# Altium PCB Portable Power Bank.PcbDoc
Units mm, origin at the board's own origin, x right, y up, seen from the top; angles counter-clockwise.
Board outline 51 x 35 mm, 2 copper layers (Top Layer, Bottom Layer); 57 components, 43 nets, 200 pads, 73 vias.
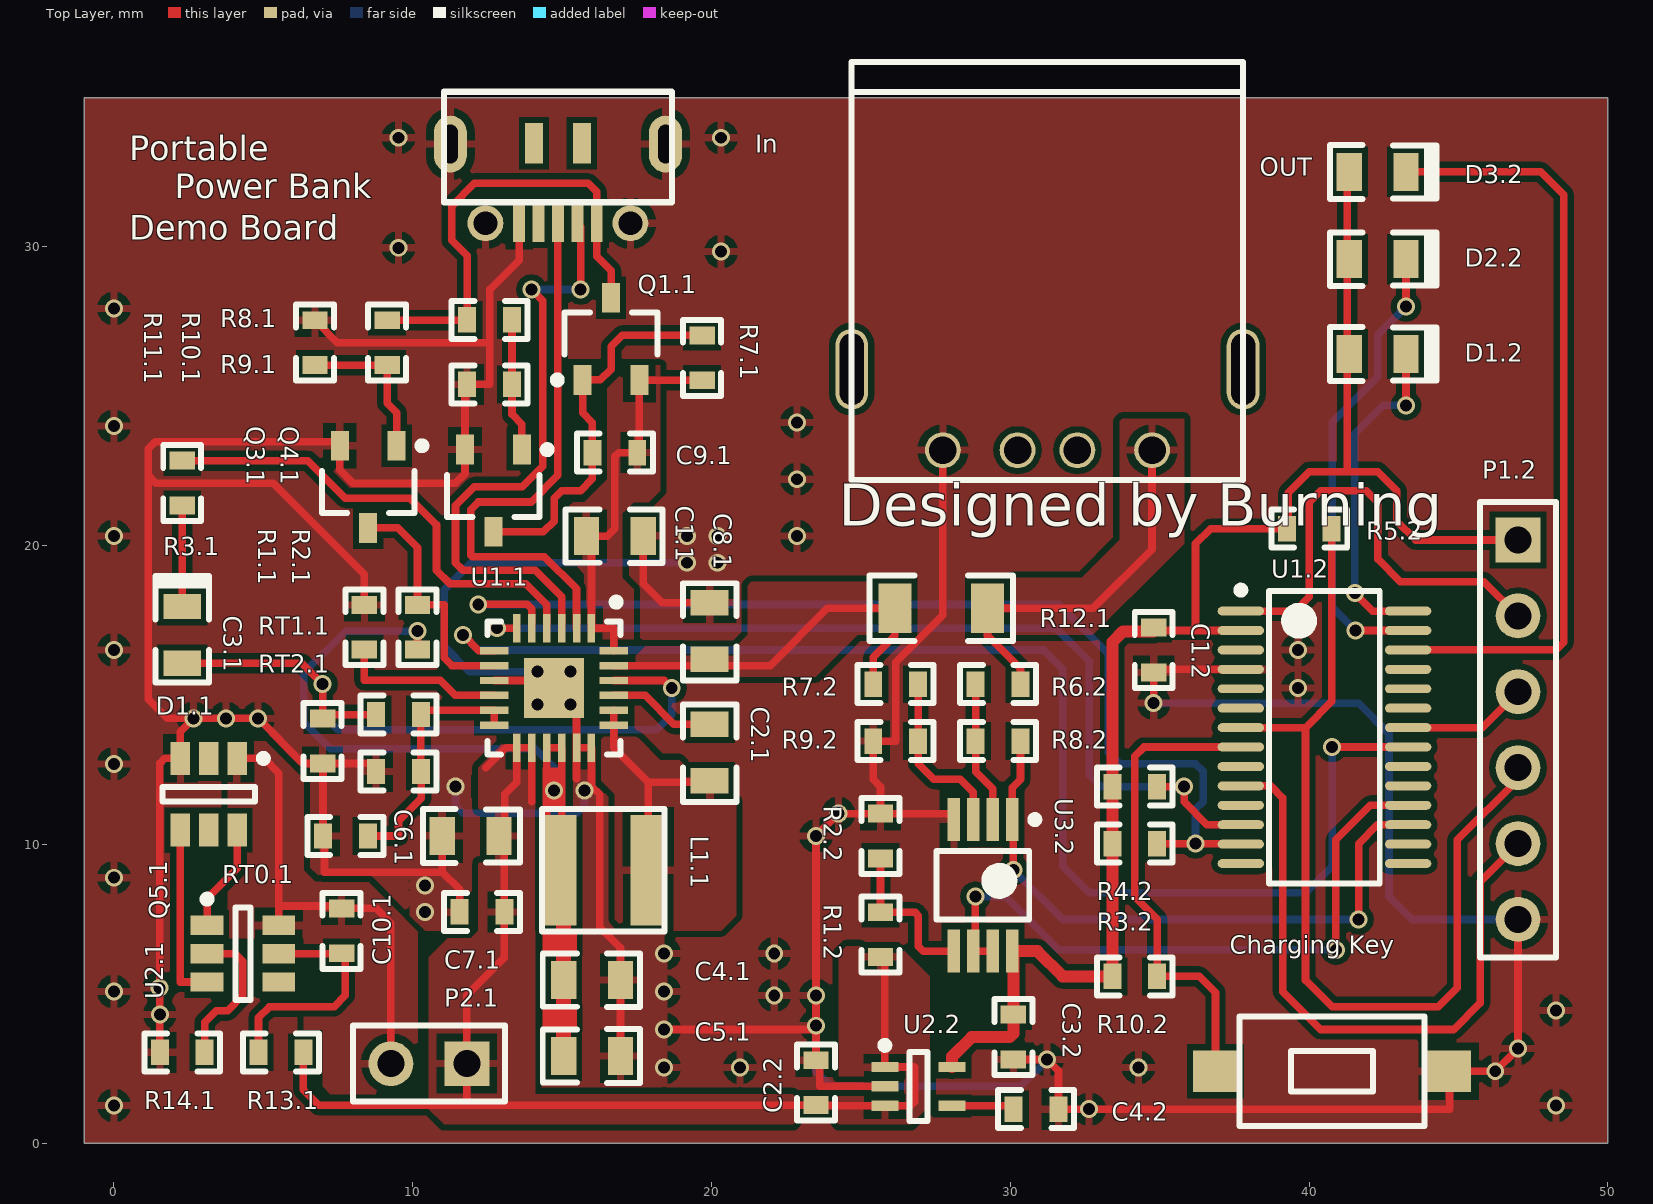
[diagram p0: Top Layer view]
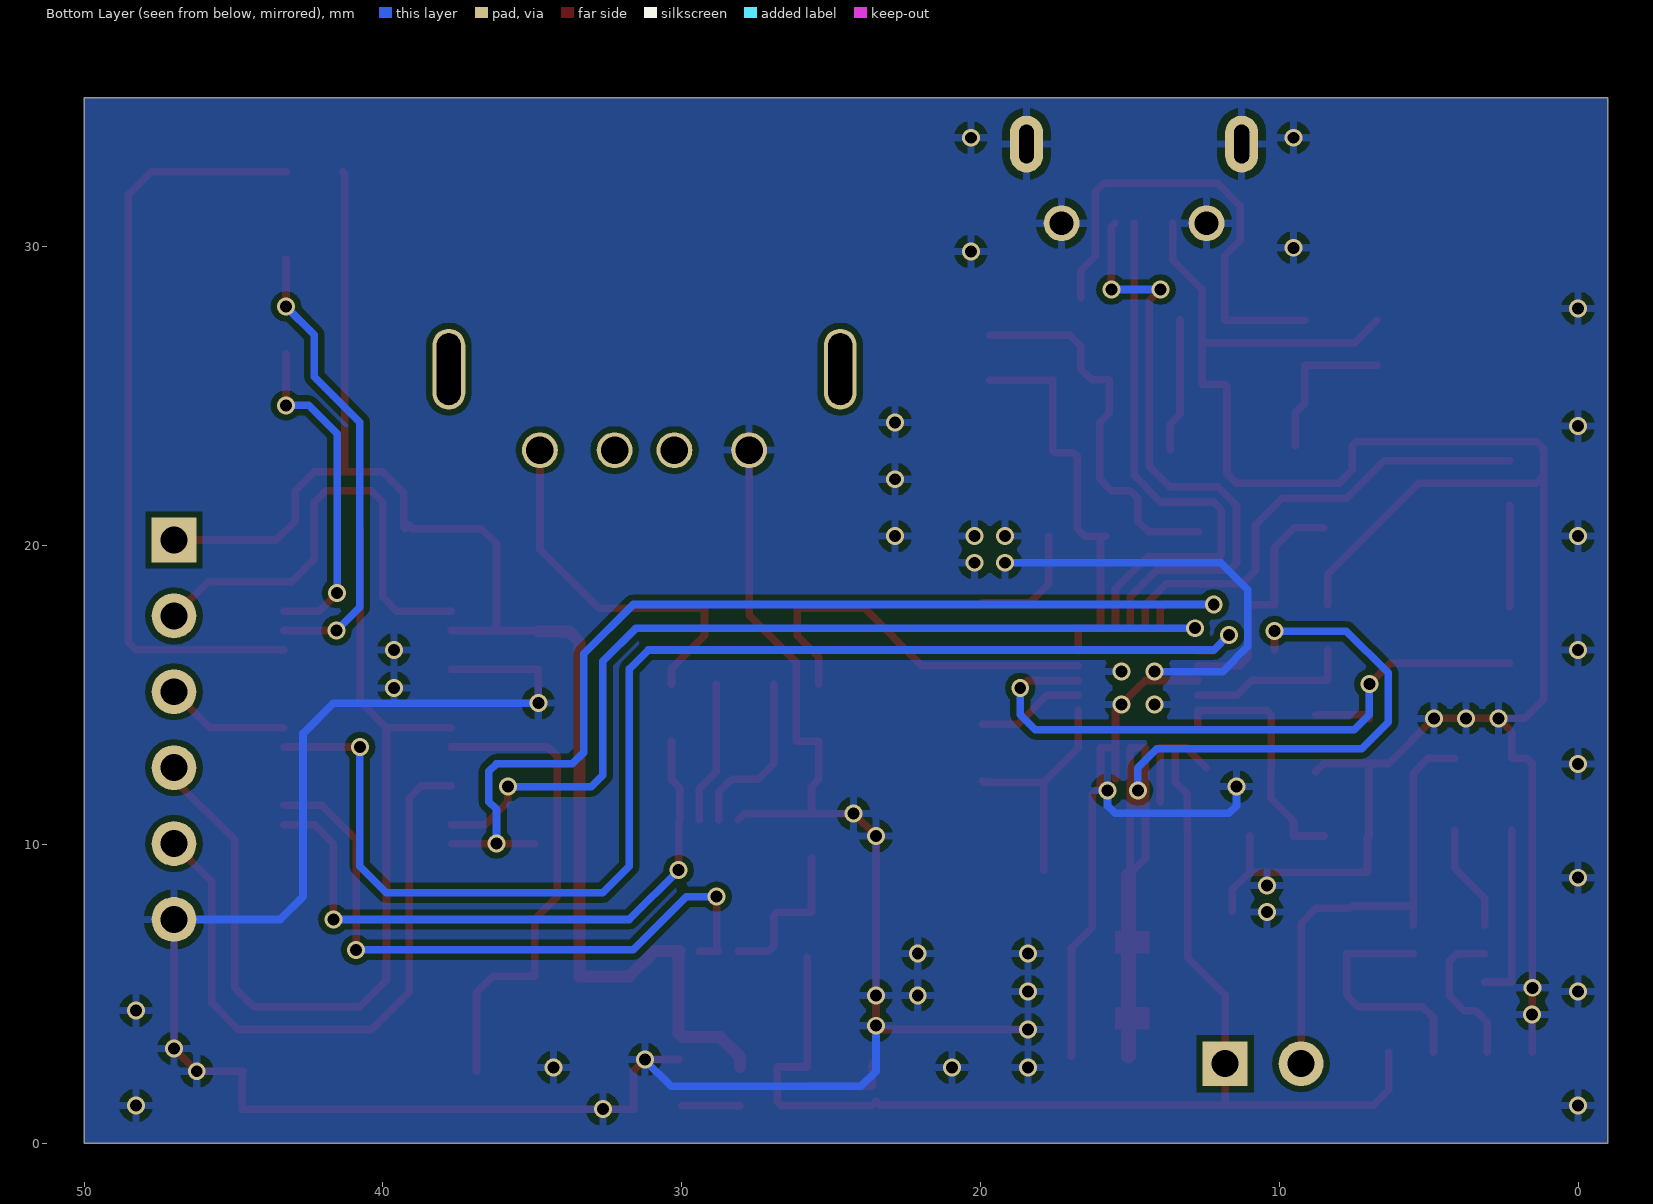
[diagram p1: Bottom Layer view, seen from below]

## Layer stack, top to bottom
Top Solder: solder mask 0.0102, Solder Resist, Dk 3.5
Top Layer: signal copper 0.0356
Dielectric 1: dielectric 0.32, FR-4, Dk 4.8
Bottom Layer: signal copper 0.0356
Bottom Solder: solder mask 0.0102, Solder Resist, Dk 3.5

## Board outline
-1,0 -1,35 50,35 50,0

## Design rules (kind name [scope] priority, off if disabled: settings)
Clearance [All] p1: gap=0.2
PolygonConnect [All] p1: connectstyle=Relief reliefconductorwidth=0.254 reliefentries=4 polygonreliefangle="90 Angle" airgapwidth=0.254
RoutingVias [All] p1: holewidth=0.711 width=1.27 viastyle="Through Hole" minholewidth=0.711 minwidth=1.27 maxholewidth=0.711 maxwidth=1.27
SolderMaskExpansion [All] p1: expansion=0.102
Width [All] p1: maxlimit=1 minlimit=0.254 preferedwidth=0.254
30 further rules are at their usual default settings.

## Classes and differential pairs
component class "Portable Power Source": C1.1 C2.1 C3.1 C4.1 C5.1 C6.1 C7.1 C8.1 C9.1 C10.1 D1.1 In L1.1 P2.1 Q1.1 Q3.1 Q4.1 Q5.1 R1.1 R2.1 R3.1 R7.1 R8.1 R9.1 R10.1 R11.1 R12.1 R13.1 R14.1 RT0.1 RT1.1 RT2.1 U1.1 U2.1

## Components (designator, comment, footprint, x,y, rotation, side; value= is the part's Value field where it differs from the comment)
C1.1 "0603" D0805 16.764,20.32 r180 top (schematic designator C1)
C1.2 "0603" D0603 34.798,16.51 r90 top (schematic designator C1)
C2.1 "0603" D0805 19.939,13.081 r270 top (schematic designator C2)
C2.2 "0603" D0603 23.495,2.032 r270 top (schematic designator C2)
C3.1 "0603" D0603 6.985,13.462 r90 top (schematic designator C3)
C3.2 "0603" D0603 30.099,3.556 r90 top (schematic designator C3)
C4.1 "0805" D0805 16.002,5.461 r180 top (schematic designator C4)
C4.2 "0603" D0603 30.861,1.143 r180 top (schematic designator C4)
C5.1 "0805" D0805 16.002,2.921 r180 top (schematic designator C5)
C6.1 "0805" D0805 11.938,10.287 r0 top (schematic designator C6)
C7.1 "0603" D0603 12.319,7.747 r0 top (schematic designator C7)
C8.1 "0805" D0805 19.939,17.145 r270 top (schematic designator C8)
C9.1 "0603" D0603 16.764,23.114 r180 top (schematic designator C9)
C10.1 "0603" D0603 7.62,7.112 r270 top (schematic designator C10)
"Charging Key" "Charging Key" SW_A 40.767,2.413 r0 top (schematic designator S1)
D1.1 "0603/0805" D0805_Diode 2.286,17.018 r90 top (schematic designator D1)
D1.2 "0603/0805" D0805_Diode 42.291,26.416 r0 top (schematic designator D1)
D2.2 "0603/0805" D0805_Diode 42.291,29.591 r0 top (schematic designator D2)
D3.2 "0603/0805" D0805_Diode 42.291,32.512 r0 top (schematic designator D3)
In "Power" Micro.Horn 14.859,32.131 r0 top (schematic designator P1)
L1.1 "Inductor" INDUCTOR.4040 16.383,9.144 r180 top (schematic designator L1)
OUT "USB Female" "USB Female" 31.242,25.908 r180 top (schematic designator P0)
P1.2 "BSL Program Interface" HDR1X6 46.99,20.193 r270 top (schematic designator P1)
P2.1 "Battery" HDR1X2 11.811,2.667 r180 top (schematic designator P2)
Q1.1 "AO3401" SOT23 16.637,26.924 r90 top (schematic designator Q1)
Q3.1 "Si2312" SOT23 8.509,21.971 r270 top (schematic designator Q3)
Q4.1 "Si2312" SOT23 12.7,21.844 r270 top (schematic designator Q4)
Q5.1 "FS8205" SOT23-6_N 3.175,11.684 r270 top (schematic designator Q5)
R1.1 "0603" D0603 8.382,17.272 r270 top (schematic designator R1)
R1.2 "0603" D0603 25.654,6.985 r270 top (schematic designator R1)
R2.1 "0603" D0603 10.16,17.272 r270 top (schematic designator R2)
R2.2 "0603" D0603 25.654,10.287 r270 top (schematic designator R2)
R3.1 "0603" D0603 2.286,22.098 r270 top (schematic designator R3)
R3.2 "0603" D0603 34.163,10.033 r180 top (schematic designator R3)
R4.2 "0603" D0603 34.163,11.938 r180 top (schematic designator R4)
R5.2 "0603" D0603 40.005,20.574 r0 top (schematic designator R5)
R6.2 "0603" D0603 29.591,15.367 r0 top (schematic designator R6)
R7.1 "0603" D0603 19.685,26.289 r90 top (schematic designator R7)
R7.2 "0603" D0603 26.162,15.367 r0 top (schematic designator R7)
R8.1 "0603" D0603 12.573,27.559 r180 top (schematic designator R8)
R8.2 "0603" D0603 29.591,13.462 r0 top (schematic designator R8)
R9.1 "0603" D0603 12.573,25.4 r0 top (schematic designator R9)
R9.2 "0603" D0603 26.162,13.462 r0 top (schematic designator R9)
R10.1 "0603" D0603 9.144,26.797 r90 top (schematic designator R10)
R10.2 "0603" D0603 34.163,5.588 r0 top (schematic designator R10)
R11.1 "0603" D0603 6.731,26.797 r270 top (schematic designator R11)
R12.1 "2512" D1206 27.686,17.907 r180 top (schematic designator R12)
R13.1 "0603" D0603 5.588,3.048 r180 top (schematic designator R13)
R14.1 "0603" D0603 2.286,3.048 r0 top (schematic designator R14)
RT0.1 "0603" D0603 7.747,10.287 r0 top (schematic designator RT0)
RT1.1 "0603" D0603 9.525,14.351 r180 top (schematic designator RT1)
RT2.1 "0603" D0603 9.525,12.446 r0 top (schematic designator RT2)
U1.1 "bq24195" QFN24 14.732,15.24 r270 top (schematic designator U1)
U1.2 "MSP430F21x2" TSSOP28 40.513,13.589 r0 top (schematic designator U1)
U2.1 "DW01" SOT23-6_N 4.318,6.35 r0 top (schematic designator U2)
U2.2 "RT9193" SC70-5 26.924,1.905 r0 top (schematic designator U2)
U3.2 "TLV342" TSSOP8 29.083,8.636 r270 top (schematic designator U3)

## Footprints (in the part's own frame and the unit in brackets; to place one, negate y for a bottom-side part, rotate by r counter-clockwise, add the part's x,y. Pads: shape width x height; smd on the part's side, far side on the other; paste and mask are expansions set on the pad)
D0603 [mm] "D0603"
  rect 0.6x0.85 smd: 1(-0.75,0) 2(0.75,0)
  silkscreen extent -1.27,-0.64 1.27,0.64, body extent -0.8,-0.4 0.8,0.4, height 0.5
D0805 [mm] "D0805"
  rect 0.85x1.27 smd: 1(-0.95,0) 2(0.95,0)
  silkscreen extent -1.6,-0.9 1.65,0.9, body extent -1,-0.64 1,0.64, height 1.25
D0805_Diode [mm] "D0805 Diode"
  rect 0.85x1.27 smd: 1(-0.95,0) 2(0.95,0)
  silkscreen extent -1.6,-0.99 1.97,0.99, body extent -1,-0.64 1,0.64, height 1.25
D1206 [mm] "D1206"
  rect 1.1x1.65 smd: 1(-1.55,0) 2(1.55,0)
  silkscreen extent -2.4,-1.1 2.4,1.1, body extent -1.6,-0.8 1.6,0.8, height 1.1
HDR1X2 [mm] "Connector; Header; 2 Position"
  rect 1.5x1.5 hole 0.9: 1(0,0)
  round 1.5 hole 0.9: 2(2.54,0)
  silkscreen extent -1.27,-1.27 3.81,1.27
HDR1X6 [mm] "Connector; Header; 6 Position"
  rect 1.5x1.5 hole 0.9: 1(0,0)
  round 1.5 hole 0.9: 2(2.54,0) 3(5.08,0) 4(7.62,0) 5(10.16,0) 6(12.7,0)
  silkscreen extent -1.27,-1.27 13.97,1.27
INDUCTOR.4040 [mm]
  rect 1.2x3.7 smd mask+0.05: 1(-1.5,0) 2(1.5,0)
  silkscreen extent -2.05,-2.05 2.05,2.05
Micro.Horn [mm]
  oval 1.1x1.9 hole 0.5 slot 1.3 at 90 deg: 0(-3.6,1.313) 0(3.6,1.313)
  round 1.2 hole 0.8: 0(-2.425,-1.337) 0(2.425,-1.337)
  rect 0.6x1.35 smd: 0(-0.8,1.338) 0(0.8,1.338)
  rect 0.4x1.25 smd: 1(1.3,-1.337) 2(0.65,-1.337) 3(0,-1.337) 4(-0.65,-1.337) 5(-1.3,-1.337)
  silkscreen extent -3.81,-0.64 3.81,3.06
QFN24 [mm] "QFN, 24-Leads, Body 4.00x4.00mm, Pitch 0.50mm, Thermal Pad 2.70x2.70mm, IPC Low Density"
  rect 0.95x0.25 smd: 1(-2,1.25) 2(-2,0.75) 3(-2,0.25) 4(-2,-0.25) 5(-2,-0.75) 6(-2,-1.25) 13(2,-1.25) 14(2,-0.75) 15(2,-0.25) 16(2,0.25) 17(2,0.75) 18(2,1.25)
  rect 0.25x0.95 smd: 7(-1.25,-2) 8(-0.75,-2) 9(-0.25,-2) 10(0.25,-2) 11(0.75,-2) 12(1.25,-2) 19(1.25,2) 20(0.75,2) 21(0.25,2) 22(-0.25,2) 23(-0.75,2) 24(-1.25,2)
  rect 2x2 smd: 25(0,0)
  silkscreen extent -3,-2.22 2.22,2.23, body extent -2.08,-2.07 2.07,2.08, height 1
SC70-5 [mm] "SC70, 5-Leads, Body 2.03x2.13mm, Pitch 0.65mm, IPC Medium Density"
  rect 0.9x0.35 smd: 1(-1.125,0.65) 2(-1.125,0) 3(-1.125,-0.65) 4(1.125,-0.65) 5(1.125,0.65)
  silkscreen extent -1.25,-1.15 0.3,1.5, body extent -0.67,-1.12 0.67,1.13, height 1.1
SOT23 [mm] "SOT23, 3-Leads, Body 2.90x2.80mm, Pitch 0.95mm, IPC Medium Density"
  rect 1x0.6 smd: 1(-1.375,0.95) 2(1.375,0) 3(-1.375,-0.95)
  silkscreen extent -1.5,-1.55 0.87,1.92, body extent -0.88,-1.52 0.87,1.53, height 1.45
SOT23-6_N [mm] "SOT23, 6-Leads, Body 2.9x1.6mm, Pitch 0.95mm, Lead Span 2.7mm, IPC Medium Density"
  rect 1.1x0.65 smd: 1(-1.2,0.95) 2(-1.2,0) 3(-1.2,-0.95) 4(1.2,-0.95) 5(1.2,0) 6(1.2,0.95)
  silkscreen extent -1.32,-1.55 0.25,1.95, body extent -0.9,-1.55 0.9,1.55, height 1.45
SW_A [mm] "SMA Switch"
  rect 1.5x1.4 smd mask+0.05: 1(-3.9,0) 2(3.9,0)
  silkscreen extent -3.1,-1.83 3.1,1.83, body extent -3.1,-1.83 3.1,1.83, height 2
TSSOP8 [mm] "TSOP, 8-Leads, Body 3.00x3.00mm, Pitch 0.65mm, IPC Medium Density"
  rect 1.45x0.42 smd: 1(-2.2,0.975) 2(-2.2,0.325) 3(-2.2,-0.325) 4(-2.2,-0.975) 5(2.2,-0.975) 6(2.2,-0.325) 7(2.2,0.325) 8(2.2,0.975)
  silkscreen extent -2.32,-1.55 1.15,1.86, body extent -1.55,-1.55 1.55,1.55, height 1.1
TSSOP28 [mm] "TSOP, 28-Leads, Body 9.70x4.40mm, Pitch 0.65mm, IPC High Density"
  oval 1.55x0.3 smd: 1(-2.8,4.225) 2(-2.8,3.575) 3(-2.8,2.925) 4(-2.8,2.275) 5(-2.8,1.625) 6(-2.8,0.975) 7(-2.8,0.325) 8(-2.8,-0.325) 9(-2.8,-0.975) 10(-2.8,-1.625) 11(-2.8,-2.275) 12(-2.8,-2.925) 13(-2.8,-3.575) 14(-2.8,-4.225) 15(2.8,-4.225) 16(2.8,-3.575) 17(2.8,-2.925) 18(2.8,-2.275) 19(2.8,-1.625) 20(2.8,-0.975) 21(2.8,-0.325) 22(2.8,0.325) 23(2.8,0.975) 24(2.8,1.625) 25(2.8,2.275) 26(2.8,2.925) 27(2.8,3.575) 28(2.8,4.225)
  silkscreen extent -2.92,-4.9 1.85,5.05, body extent -2.25,-4.9 2.25,4.9, height 1.2
"USB Female" [mm]
  round 1.2 hole 0.92 mask+0.05: 1(-3.5,2.71) 2(-1,2.71) 3(1,2.71) 4(3.5,2.71)
  oval 1.1x2.7 hole 0.8 slot 2.4 at 90 deg mask+0.05: 5(-6.55,0) 5(6.55,0)
  silkscreen extent -6.55,-10.28 6.55,3.71

## Part data
C1.1 C1.2 C2.1 C2.2 C3.1 C3.2 C4.1 C4.2 C5.1 C6.1 C7.1 C8.1 C9.1 C10.1: library part Cap, "Capacitor"
"Charging Key": library part SW-PB, "Switch"
D1.1 D1.2 D2.2 D3.2: library part LED0, "Typical INFRARED GaAs LED"
In: library part "Micro USB Horn", "MIcro USB Connector Horn"
P1.2: library part "Header 6", "Header, 6-Pin"
P2.1: library part "Header 2", "Header, 2-Pin"
Q1.1: "AO3401 P-Channel MOSFET"
Q3.1 Q4.1: "SI2312 N-Channel MOSFEt"
Q5.1: "FS8205 Dual MOS"
R1.1 R1.2 R2.1 R2.2 R3.1 R3.2 R4.2 R5.2 R6.2 R7.1 R7.2 R8.1 R8.2 R9.1 R9.2 R10.1 R10.2 R11.1 R12.1 R13.1 R14.1 RT0.1 RT1.1 RT2.1: library part Res1, "Resistor"
U1.1: "A Battery charger manager published by Ti"
U1.2: library part MSP430F21x2_PW, "MSP430F21x2_PW"
U2.1: "Battery Protector"
U2.2: "3V3 Voltage Regulator"
U3.2: library part LPV358, "LPV358 Op Amp"

## Via types
v1: diameter 0.6, hole 0.4, Top Layer to Bottom Layer, 73 vias

## Nets (pads, with @x,y where several pads share a name; then routed paths per layer and width w, separated by ;. In a path a pad name is that pad's centre, name@x,y a point inside that pad or via, vN(x,y) a via of type N, cw(c..) or ccw(c..) an arc to the next point about the centre after c; other vN are vias at no path point)
3V3: C1.2.2 C3.2.2 D1.2.1 D2.2.1 D3.2.1 P1.2.1 R3.2.2 R4.2.2 R5.2.1 R10.2.1 U1.2.2 U2.2.5 U3.2.8 | length 51.7
  Top Layer w0.254: U3.2.8 U3.2.8@30.099,6.395 ; C1.2.2@34.798,17.133 34.829,17.164 36.195,17.164 ; U1.2.2 36.195,17.164 ; R5.2.1@39.128,20.701 39.001,20.574 36.703,20.574 36.195,20.066 36.195,17.164 ; R5.2.1 39.306,20.626 39.306,21.78 40.005,22.479 41.275,22.479 ; D3.2.1 41.275,32.446 41.275,22.479 ; P1.2.1 43.561,20.193 42.926,20.828 42.926,21.844 42.291,22.479 41.275,22.479
  Top Layer w0.4: U2.2.5 28.049,2.903 28.702,3.556 29.972,3.556 30.099,3.683 C3.2.2 U3.2.8@30.099,6.395 ; U3.2.8 30.902,6.436 31.75,5.588 R10.2.1 R4.2.2 33.413,16.776 33.77,17.133 C1.2.2@34.798,17.133
ADC_B: U1.2.18 U3.2.6 U3.2.7 | length 21.9
  Top Layer w0.254: v1(28.829,8.255) 28.829,6.507 U3.2.6 U3.2.7 ; v1(40.894,6.477) 40.894,10.16 42.048,11.314 U1.2.18
  Bottom Layer w0.254: v1(28.829,8.255) 29.845,8.255 31.623,6.477 v1(40.894,6.477)
ADC_L: R8.2.2 U1.2.17 U3.2.1 | length 21.2
  Top Layer w0.254: v1(30.099,9.144) 30.099,10.795 U3.2.1 30.058,11.897 30.341,12.18 R8.2.2 ; v1(41.656,7.493) 41.656,10.033 42.287,10.664 U1.2.17
  Bottom Layer w0.254: v1(30.099,9.144) 31.75,7.493 v1(41.656,7.493)
BAT: C2.2.2 C6.1.2 C7.1.2 P2.1.1 R1.2.2 R13.1.1 U1.1.13 U1.1.14 U2.2.1 U2.2.3 | length 44.2
  Top Layer w0.254: R13.1.1 6.338,1.79 6.858,1.27 11.811,1.27 ; 12.446,12.573 13.113,13.24 U1.1.13 ; 13.982,11.442 U1.1.14 U1.1.13 ; R1.2.2@25.799,6.235 U2.2.1 26.782,2.555 26.797,2.54 26.797,1.397 26.655,1.255 U2.2.3 23.649,1.255 23.495,1.409 23.356,1.27 11.811,1.27 ; 11.811,1.27 P2.1.1 11.811,4.953 13.069,6.211 C7.1.2 13.069,10.468 13.081,10.48 13.081,11.684 13.482,12.085 U1.1.13
D+: In.3 U1.1.2 | length 18.7
  Top Layer w0.254: In.3 14.859,22.359 13.963,21.463 12.192,21.463 11.938,21.209 11.938,19.685 11.991,19.632 14.404,19.632 15.482,18.554 U1.1.2
D-: In.2 U1.1.3 | length 20.4
  Top Layer w0.254: v1(13.97,28.575) 14.351,28.194 14.351,22.658 13.664,21.971 12.058,21.971 11.43,21.343 11.43,19.431 11.683,19.178 14.096,19.178 14.982,18.292 U1.1.3 ; In.2 15.621,30.681 v1(15.621,28.575)
  Bottom Layer w0.254: v1(13.97,28.575) v1(15.621,28.575)
GND: "Charging Key.2" C1.1.1 C1.2.1 C2.2.1 C3.1.1 C3.2.1 C4.1.1 C4.2.1 C5.1.1 C6.1.1 C7.1.1 C8.1.1 In.0@11.259,33.444 In.0@12.434,30.794 In.0@17.284,30.794 In.0@18.459,33.444 In.5 OUT.4 P1.2.6 Q3.1.3 Q4.1.3 Q5.1.3 R1.1.1 R2.2.1 R9.1.1 R9.2.1 R11.1.1 R14.1.1 RT0.1.1 RT2.1.1 U1.1.9 U1.1.17 U1.1.18 U1.1.25 U1.2.4 U2.2.2 U3.2.4 | length 207.5
  Top Layer w0.254: R14.1.1 1.536,12.712 1.708,12.884 Q5.1.3 2.225,13.782 v1(2.667,14.224) ; R11.1.1 7.481,26.797 12.573,26.797 ; R1.1.1 8.382,19.05 5.334,22.098 1.397,22.098 1.143,22.352 ; RT2.1.1 8.509,12.712 C3.1.1 ; C6.1.1 10.988,9.078 ; C7.1.1 11.569,8.497 10.988,9.078 ; U1.1.9 14.482,15.49 U1.1.25 v1(15.282,14.69) ; In.5 13.559,29.561 12.573,28.575 12.573,26.797 ; 15.482,12.204 U1.1.17 ; U1.1.25@15.482,14.49 U1.1.17 ; C5.1.1 C4.1.1 16.952,6.543 16.256,7.239 16.256,11.684 15.982,11.958 U1.1.18 U1.1.17 ; C1.1.1 17.714,18.735 18.354,18.095 C8.1.1 ; v1(18.415,3.81) 23.368,3.81 v1(23.495,3.937) ; U2.2.2 25.799,1.909 23.618,1.909 23.618,2.659 C2.2.1 v1(23.495,3.937) ; OUT.4 27.742,17.676 26.162,16.096 26.162,13.462 R9.2.1 25.412,12.18 25.654,11.938 R2.2.1 ; U3.2.4 27.907,11.037 R2.2.1 ; C3.2.1 v1(31.23,2.806) 31.611,2.425 C4.2.1 v1(32.639,1.143) 44.704,1.143 44.704,2.376 44.667,2.413 v1(46.228,2.413) v1(46.99,3.175) P1.2.6 ; v1(34.798,14.732) C1.2.1 ; C1.2.1@34.798,15.864 U1.2.4 ; 1.143,22.352 1.143,23.241 1.377,23.475 7.43,23.475 Q3.1.3 7.559,22.54 8.001,22.098 11.43,22.098 11.75,22.418 Q4.1.3 11.75,25.327 R9.1.1 12.573,25.4 12.573,26.797 ; 1.143,22.352 1.143,14.859 1.778,14.224 v1(2.667,14.224) ; v1(2.667,14.224) v1(3.746,14.224) v1(4.826,14.224) 6.338,12.712 C3.1.1 ; C3.1.1 6.997,12.7 RT0.1.1 7.046,10.238 7.046,9.078 10.988,9.078 ; v1(23.495,3.937) v1(23.495,4.953) v1(23.495,10.287) v1(24.245,11.037) R2.2.1
  Bottom Layer w0.254: v1(11.43,11.938) 11.43,11.303 11.684,11.049 15.494,11.049 15.748,11.303 v1(15.748,11.811) ; v1(14.182,15.79) 11.896,15.79 11.049,16.637 11.049,18.526 11.954,19.431 v1(19.177,19.431) ; v1(23.495,3.937) 23.495,2.413 24.003,1.905 30.353,1.905 31.23,2.782 v1(31.23,2.806) ; v1(34.798,14.732) 41.656,14.732 42.672,13.716 42.672,8.255 43.434,7.493 P1.2.6
  other v1: 0,1.27 48.26,1.27 18.415,2.54 20.955,2.54 34.29,2.54 1.536,4.318 48.26,4.445 22.098,4.953 0,5.08 18.415,5.08 1.524,5.207 18.415,6.35 22.098,6.35 10.414,7.747 10.414,8.636 0,8.89 0,12.7 14.182,14.69 39.624,15.24 15.282,15.79 0,16.51 39.624,16.51 20.193,19.431 0,20.32 19.177,20.32 20.193,20.32 22.86,20.32 22.86,22.225 0,24.003 22.86,24.13 0,27.94 20.32,29.845 9.525,29.972 9.525,33.655 20.32,33.655
INT: U1.1.7 U1.2.21 | length 44.8
  Top Layer w0.254: v1(11.684,17.018) 12.212,16.49 U1.1.7 ; v1@40.711,13.264 v1(40.767,13.264) U1.2.21
  Bottom Layer w0.254: v1(11.684,17.018) 12.192,16.51 31.115,16.51 31.75,15.875 31.75,9.271 32.639,8.382 39.878,8.382 40.767,9.271 v1(40.767,13.264)
KEY: "Charging Key.1" R10.2.2 U1.2.8 | length 16.2
  Top Layer w0.254: 36.867,2.413 36.867,5.043 36.322,5.588 R10.2.2 34.913,7.505 34.163,8.255 34.163,12.954 34.473,13.264 U1.2.8
LED1: D1.2.2 U1.2.28 | length 11.2
  Top Layer w0.254: v1(41.529,18.415) 42.13,17.814 U1.2.28 ; v1(43.241,24.699) D1.2.2
  Bottom Layer w0.254: v1(41.529,18.415) 41.529,23.749 42.479,24.699 v1(43.241,24.699)
LED2: D2.2.2 U1.2.27 | length 15.5
  Top Layer w0.254: v1(41.548,17.164) U1.2.27 ; v1(43.241,28.006) D2.2.2
  Bottom Layer w0.254: v1(41.548,17.164) 40.767,17.945 40.767,24.13 42.291,25.654 42.291,27.056 v1(43.241,28.006)
LED3: D3.2.2 U1.2.26 | length 25.9
  Top Layer w0.254: D3.2.2 47.752,32.512 48.514,31.75 48.514,16.764 48.264,16.514 U1.2.26
NetC1.1_2: C1.1.2 C9.1.1 Q1.1.3 R7.1.1 U1.1.1 U1.1.24 | length 13.3
  Top Layer w0.254: C1.1.2 16.51,20.32 16.764,20.574 16.764,22.987 16.891,23.114 C9.1.1 17.587,23.187 Q1.1.3 17.597,25.539 R7.1.1 ; C1.1.2@15.982,20.152 U1.1.1 16.732,17.24 U1.1.24
NetC2.1_1: C2.1.1 U1.1.21 | length 3.6
  Top Layer w0.254: U1.1.21 17.776,14.99 18.735,14.031 C2.1.1
NetC2.1_2: C2.1.2 L1.1.1 U1.1.19 U1.1.20 | length 7.9
  Top Layer w0.254: U1.1.20 U1.1.19 16.732,13.24 17.883,12.089 ; L1.1.1 17.883,12.089 ; C2.1.2 19.897,12.089 17.883,12.089
NetC4.2_2: C4.2.2 U2.2.4 | length 1.9
  Top Layer w0.254: U2.2.4 C4.2.2@29.999,1.255
NetC8.1_2: C8.1.2 R7.2.1 R12.1.2 U1.1.23 | length 13
  Top Layer w0.254: U1.1.23 21.959,15.99 23.876,17.907 R12.1.2 26.136,16.992 25.412,16.268 R7.2.1
NetC9.1_2: C9.1.2 Q1.1.1 Q4.1.2 R7.1.2 | length 13
  Top Layer w0.254: Q4.1.2 14.373,20.469 14.732,20.828 14.732,21.59 14.986,21.844 15.621,21.844 16.014,22.237 C9.1.2 16.014,24.118 15.687,24.445 Q1.1.1 16.278,25.549 16.637,25.908 16.637,26.67 17.006,27.039 R7.1.2
NetC10.1_1: C10.1.1 P2.1.2 Q5.1.1 U2.1.6 | length 15.4
  Top Layer w0.254: Q5.1.1 5.023,12.884 5.518,12.389 5.518,7.944 ; U2.1.6 5.518,7.944 ; P2.1.2 9.271,7.366 8.775,7.862 C10.1.1 7.538,7.944 5.518,7.944
NetC10.1_2: C10.1.2 R13.1.2 U2.1.5 | length 8
  Top Layer w0.254: R13.1.2 4.838,4.203 5.207,4.572 7.366,4.572 7.747,4.953 7.747,6.362 7.735,6.35 U2.1.5
NetD1.1_2: D1.1.2 R3.1.2 | length 3.4
  Top Layer w0.254: D1.1.2 R3.1.2
NetP0.3_1: OUT.1 R6.2.2 R12.1.1 | length 12.6
  Top Layer w0.254: R6.2.2 30.341,15.887 29.236,16.992 R12.1.1 32.766,17.907 34.742,19.883 OUT.1
NetP1.1_1: In.1 Q1.1.2 R8.1.2 R10.1.2 | length 15.7
  Top Layer w0.254: R10.1.2 11.811,27.547 R8.1.2 11.823,29.706 11.303,30.226 11.303,31.369 12.065,32.131 15.875,32.131 16.159,31.847 In.1 16.159,29.688 16.637,29.21 Q1.1.2
NetQ3.1_1: Q3.1.1 R10.1.1 R11.1.2 | length 5.2
  Top Layer w0.254: R11.1.2 R10.1.1 9.144,24.765 9.459,24.45 Q3.1.1
NetQ3.1_2: Q3.1.2 R2.1.1 U1.1.8 | length 8.3
  Top Layer w0.254: Q3.1.2 9.503,20.596 10.16,19.939 R2.1.1 11.049,18.022 11.049,16.256 11.315,15.99 U1.1.8
NetQ4.1_1: Q4.1.1 R8.1.1 R9.1.2 | length 4.5
  Top Layer w0.254: R8.1.1 R9.1.2 13.323,24.396 13.65,24.069 Q4.1.1
NetQ5.1_4: Q5.1.4 U2.1.3 | length 6
  Top Layer w0.254: Q5.1.4 2.22,10.479 2.22,5.4 U2.1.3
NetQ5.1_6: Q5.1.6 U2.1.1 | length 3.6
  Top Layer w0.254: U2.1.1 3.118,8.198 4.125,9.205 Q5.1.6
NetR1.1_2: R1.1.2 U1.1.10 | length 5.6
  Top Layer w0.254: R1.1.2 8.382,15.494 10.922,15.494 11.426,14.99 U1.1.10
NetR1.2_1: R1.2.1 R2.2.2 U3.2.5 | length 5.4
  Top Layer w0.254: R2.2.2 R1.2.1 26.809,7.735 26.924,7.62 26.924,6.604 27.092,6.436 U3.2.5
NetR6.2_1: R6.2.1 R8.2.1 U3.2.2 | length 4.8
  Top Layer w0.254: R6.2.1 R8.2.1 28.841,12.434 29.408,11.867 U3.2.2
NetR7.2_2: R7.2.2 R9.2.2 U3.2.3 | length 5.8
  Top Layer w0.254: R7.2.2 R9.2.2 26.912,12.712 27.432,12.192 28.321,12.192 28.758,11.755 U3.2.3
NetR14.1_2: R14.1.2 U2.1.2 | length 5.1
  Top Layer w0.254: R14.1.2 3.036,4.052 3.429,4.445 3.81,4.445 4.318,4.953 4.318,6.096 4.064,6.35 U2.1.2
P1.1: P1.2.3 U1.2.22 | length 4.2
  Top Layer w0.254: U1.2.22 45.791,13.914 P1.2.3
P2.2: P1.2.5 U1.2.10 | length 21.4
  Top Layer w0.254: U1.2.10 38.709,11.964 39.116,11.557 39.116,5.08 40.386,3.81 44.831,3.81 45.72,4.699 45.72,8.763 P1.2.5
REGN: C3.1.2 D1.1.1 RT1.1.2 U1.1.22 | length 24
  Top Layer w0.254: D1.1.1 6.284,16.068 v1(6.985,15.367) C3.1.2 7.124,14.351 RT1.1.2 ; U1.1.22 18.419,15.49 v1(18.669,15.24)
  Bottom Layer w0.254: v1(6.985,15.367) 6.985,14.351 7.493,13.843 18.161,13.843 18.669,14.351 v1(18.669,15.24)
RST: P1.2.4 R5.2.2 U1.2.7 | length 31.6
  Top Layer w0.254: U1.2.7 39.878,13.914 ; R5.2.2 40.755,14.791 39.878,13.914 ; P1.2.4 46.99,12.192 44.958,10.16 44.958,5.207 44.323,4.572 40.767,4.572 39.878,5.461 39.878,13.914
SCL: R3.2.1 U1.1.5 U1.2.13 | length 36.3
  Top Layer w0.254: v1(12.192,18.034) 12.2,18.042 13.828,18.042 13.982,17.888 U1.1.5 ; R3.2.1 v1(36.195,10.033) U1.2.13@37.694,10.033
  Bottom Layer w0.254: v1(12.192,18.034) 31.623,18.034 33.274,16.383 33.274,13.081 33.655,12.7 36.195,12.7 36.449,12.446 36.449,11.43 36.195,11.176 v1(36.195,10.033)
SDA: R4.2.1 U1.1.6 U1.2.12 | length 31.7
  Top Layer w0.254: v1(12.827,17.24) U1.1.6 ; R4.2.1 v1(35.814,11.938) 35.814,11.43 36.58,10.664 U1.2.12
  Bottom Layer w0.254: v1(12.827,17.24) 31.528,17.24 32.639,16.129 32.639,12.319 33.02,11.938 v1(35.814,11.938)
STAT: R3.1.1 U1.1.4 | length 15.9
  Top Layer w0.254: R3.1.1 6.489,22.848 7.747,21.59 9.906,21.59 10.795,20.701 10.795,19.177 11.248,18.724 13.788,18.724 14.482,18.03 U1.1.4
SYS: C4.1.2 C5.1.2 L1.1.2 R2.1.2 U1.1.15 U1.1.16 | length 30.5
  Top Layer w0.254: R2.1.2 v1(10.16,17.145) ; 14.478,11.43 14.478,9.549 L1.1.2 L1.1.2@15.052,8.975 ; 14.482,12.45 U1.1.15 U1.1.16 L1.1.2@14.982,9.243
  Top Layer w0.5: C5.1.2 C4.1.2 L1.1.2@15.052,8.975
  Bottom Layer w0.254: v1(10.16,17.145) 7.757,17.145 6.358,15.746 6.358,14.089 7.239,13.208 14.097,13.208 14.732,12.573 v1(14.732,11.811)
TEST: P1.2.2 U1.2.1 | length 15.7
  Top Layer w0.254: U1.2.1 39.531,17.814 40.005,18.288 40.005,21.463 40.386,21.844 41.91,21.844 42.291,21.463 42.291,19.558 43.053,18.796 45.847,18.796 P1.2.2
TS: RT0.1.2 RT1.1.1 RT2.1.2 U1.1.11 U1.1.12 | length 8.4
  Top Layer w0.254: RT0.1.2 9.525,10.287 9.525,10.795 10.287,11.557 10.287,12.434 RT2.1.2 RT1.1.1 10.414,14.49 U1.1.11 U1.1.12
pads on no net: In.0@14.059,33.469 In.0@15.659,33.469 In.4 OUT.2 OUT.3 OUT.5 Q5.1.2 Q5.1.5 U1.2.3 U1.2.5 U1.2.6 U1.2.9 U1.2.11 U1.2.14 U1.2.15 U1.2.16 U1.2.19 U1.2.20 U1.2.23 U1.2.24 U1.2.25 U2.1.4

## Polygon pours and split planes (outlines as drawn)
BAT on Top Layer "Top Layer-No Net" (solid, remove dead copper, pour order 13): 13.335,13.716 14.097,13.716 14.097,4.064 14.097,1.27 10.541,1.27 10.541,6.223 11.176,6.858 11.938,6.858 12.192,7.112 12.192,12.573
GND on Top Layer "Top Layer-No Net" (solid, remove dead copper, pour order 14): 11.938,12.573 11.938,7.112 11.049,7.112 10.414,7.112 9.906,7.62 9.906,10.668 10.922,11.684 10.922,12.573
NetC2.1_2 on Top Layer "Top Layer-No Net" (solid, remove dead copper, pour order 15): 16.256,14.605 16.256,12.192 16.764,11.684 16.764,7.62 16.764,7.493 17.145,7.112 19.685,7.112 20.32,7.112 20.828,7.62 20.828,12.446 20.828,12.7 20.701,12.827 18.288,12.827 17.526,13.589 17.526,14.605
NetC1.1_2 on Top Layer "Top Layer-No Net" (solid, remove dead copper, pour order 16): 15.113,21.209 15.113,19.685 15.748,19.05 15.748,16.764 16.129,16.764 16.129,16.383 17.272,16.383 17.399,16.51 17.399,18.542 17.018,18.923 17.018,20.828 17.018,21.082 17.399,21.463 17.907,21.463 18.161,21.717 18.288,21.844 18.288,26.035 17.018,26.035 17.018,25.781 16.51,25.273 16.51,22.225 15.748,21.463 15.367,21.463
GND on Top Layer "Top Layer-No Net" (solid, remove dead copper, pour order 18): 17.272,20.955 17.272,18.923 18.542,17.653 18.542,17.145 18.796,16.891 20.574,16.891 20.701,16.891 20.955,17.145 20.955,20.574 20.955,20.701 20.701,20.955
BAT on Top Layer "Top Layer-No Net" (solid, remove dead copper, pour order 20): 14.097,1.663 14.109,1.651 24.257,1.651 24.257,6.35 24.511,6.604 26.289,6.604 27.051,5.842 27.305,5.588 27.305,1.27 26.67,0.635 11.049,0.635 10.541,1.143 10.541,1.663
NetC10.1_1 on Top Layer "Top Layer-No Net" (solid, remove dead copper, pour order 21): 3.81,13.462 3.81,6.858 6.35,6.858 6.35,3.81 6.985,3.81 6.985,1.905 7.239,1.651 10.033,1.651 10.287,1.905 10.16,2.032 10.16,6.985 10.16,7.112 8.636,8.636 8.509,8.763 6.731,8.763 6.35,9.144 6.35,12.065 6.35,12.192 5.08,13.462
GND on Top Layer "Top Layer-No Net" (solid, remove dead copper, pour order 22): 15.367,13.716 15.367,1.905 18.415,1.905 18.415,6.985 16.51,6.985 16.256,7.239 16.256,11.684 15.982,11.958 15.982,13.696 16.002,13.716
NetC8.1_2 on Top Layer "Top Layer-No Net" (solid, remove dead copper, pour order 23): 16.256,16.129 16.256,15.875 18.923,15.875 19.177,15.621 23.495,15.621 24.765,16.891 24.892,17.018 26.67,17.018 26.67,18.796 21.336,18.796 21.209,18.669 21.209,17.018 21.082,16.891 20.828,16.637 17.907,16.637 17.78,16.637 17.526,16.383 17.272,16.129
NetP0.3_1 on Top Layer "Top Layer-No Net" (solid, remove dead copper, pour order 24): 28.575,18.923 28.575,17.018 32.766,17.018 35.179,19.431 35.814,20.066 35.814,24.257 33.655,24.257 33.655,20.32 33.655,20.193 32.385,18.923
GND on Top Layer "Top Layer-No Net" (solid, remove dead copper, pour order 19): -1,35 -1,0 50,0 50,35
GND on Bottom Layer "Top Layer-No Net" (solid, remove dead copper, pour order 17): -1,0 -1,35 50,35 50,0

## Other copper
Top Layer:
  rectangle net SYS: 14.351,11.176 14.986,12.573
  rectangle net SYS: 14.351,6.35 15.494,7.112
  rectangle net SYS: 14.351,3.81 15.494,4.572

## Silkscreen, mask and mechanical layers (free items; w line width, h text height)
Top Overlay:
  text "Portable" at 0.508,32.639 h1.4
  text "Power Bank" at 2.032,31.369 h1.4
  text "Demo Board" at 0.508,29.972 h1.4
  text "Designed by Burning" at 24.257,20.193 h2.4
Mechanical 1:
  the board outline again, w0.254